# Altium PCB wrist_band_v2.0.PcbDoc
Units mil, origin at the board's own origin, x right, y up, seen from the top; angles counter-clockwise.
Board outline 6000 x 4000 mil, 2 copper layers (Top Layer, Bottom Layer); 82 components, 52 nets, 273 pads, 5 vias.
Unrouted connection lines stored in the file: 185.
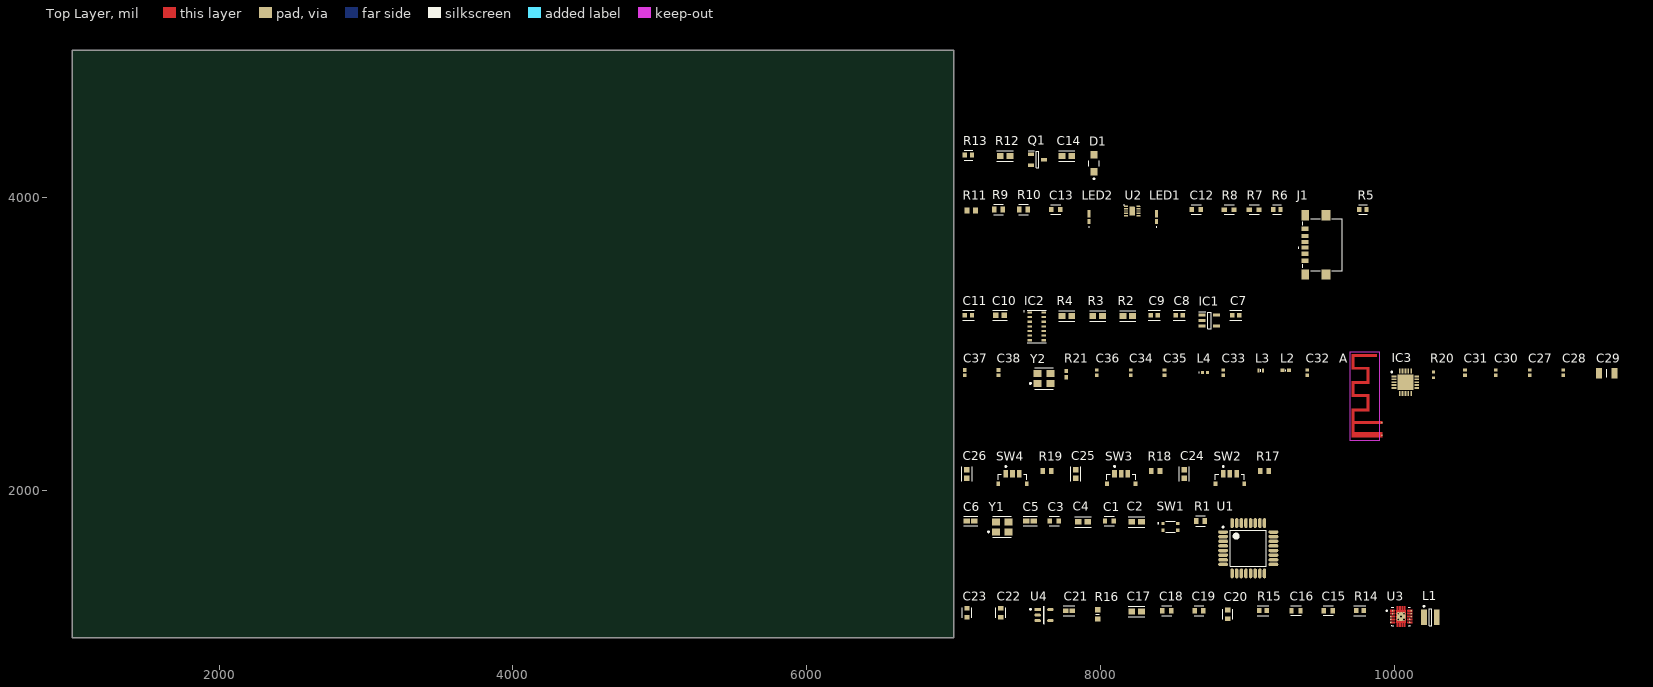
[diagram p0: Top Layer view]
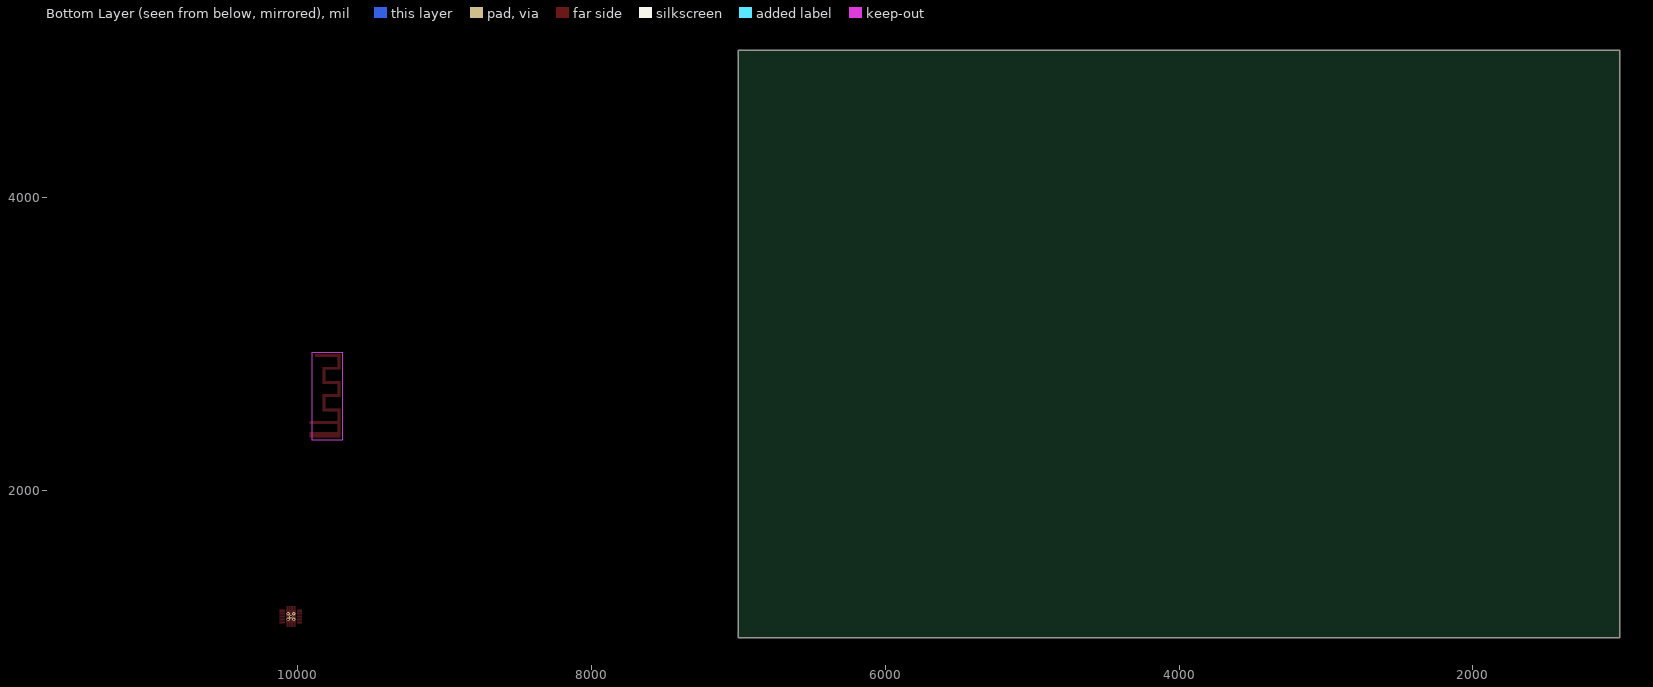
[diagram p1: Bottom Layer view, seen from below]

## Layer stack, top to bottom
Top Solder: solder mask 0.4, Solder Resist, Dk 3.5
Top Layer: signal copper 1.4
Dielectric 1: dielectric 12.6, FR-4, Dk 4.8
Bottom Layer: signal copper 1.4
Bottom Solder: solder mask 0.4, Solder Resist, Dk 3.5

## Board outline
1000,1000 7000,1000 7000,5000 1000,5000

## Design rules (kind name [scope] priority, off if disabled: settings)
Clearance [All] p1: gap=10 ignorepadtopadclearanceinfootprint=FALSE except(0: Arc-Hole Track-Hole SMDPad-Hole THPad-Hole Via-Hole Fill-Hole Poly-Hole Region-Hole Text-Hole)
PolygonConnect [All] p1: connectstyle=Relief reliefconductorwidth=10 reliefentries=4 polygonreliefangle="90 Angle" airgapwidth=10
RoutingVias [All] p1: holewidth=28 width=50 viastyle="Through Hole" minholewidth=28 minwidth=50 maxholewidth=28 maxwidth=50
SolderMaskExpansion [All] p1: expansion=4 istentingtop=FALSE
Width [All] p1: maxlimit=10 minlimit=10 preferedwidth=10
30 further rules are at their usual default settings.

## Classes and differential pairs
component class "Vibration Motor": C14 D1 Q1 R12 R13
component class "USB C charging port": C12 C13 J1 LED1 LED2 R5 R6 R7 R8 R9 R10 R11 U2
component class "Pulse Oximeter": C7 C8 C9 C10 C11 IC1 IC2 R2 R3 R4
component class Navigation_Buttons: C24 C25 C26 R17 R18 R19 SW2 SW3 SW4
component class MCU: C1 C2 C3 C4 C5 C6 R1 SW1 U1 Y1
component class "DC DC converters": C15 C16 C17 C18 C19 C20 C21 C22 C23 L1 R14 R15 R16 U3 U4

## Components (designator, comment, footprint, x,y, rotation, side; value= is the part's Value field where it differs from the comment)
A "2.4GHz antena" Antena 9900,2345 r90 top net-tie
C1 "GRM188R61A106KE69D" FP-GRM18-0_15-MFG 8060,1795 r0 top value=10uF
C2 "CL10B104KB8NNND" FP-CL10-IPC_A 8245,1790 r0 top
C3 "GRM188R61A106KE69D" FP-GRM18-0_15-MFG 7685,1795 r0 top value=10uF
C4 "CL10B104KB8NNND" FP-CL10-IPC_A 7880,1790 r0 top
C5 "C1608C0G1H220J080AA" FP-C1608-080-0_1-IPC_B 7520,1795 r0 top
C6 "C1608C0G1H220J080AA" FP-C1608-080-0_1-IPC_B 7115,1795 r0 top
C7 "CL10A105KP8NNNC" FP-CL10-IPC_C 8920,3195 r0 top
C8 "CL10A105KP8NNNC" FP-CL10-IPC_C 8535,3195 r0 top
C9 "CL10A105KP8NNNC" FP-CL10-IPC_C 8365,3195 r0 top
C10 "06036D106MAT2A" FP-0603-L_1_6_0_15-W_0_81-IPC_B 7315,3195 r0 top
C11 "CL10A105KP8NNNC" FP-CL10-IPC_C 7100,3195 r0 top
C12 "GRM188R61A106KE69D" FP-GRM18-0_15-MFG 8650,3915 r0 top value=10uF
C13 "GRM188R61A106KE69D" FP-GRM18-0_15-MFG 7695,3915 r0 top value=10uF
C14 "CL10B104KB8NNND" FP-CL10-IPC_A 7770,4280 r0 top
C15 "GRM188R61A106KE69D" FP-GRM18-0_15-MFG 9550,1185 r0 top value=10uF
C16 "GRM188R61A106KE69D" FP-GRM18-0_15-MFG 9330,1185 r0 top value=10uF
C17 "CL10B104KB8NNND" FP-CL10-IPC_A 8245,1180 r0 top
C18 "CC0603MRX5R5BB226" FP-CC0603-DC-MFG 8450,1185 r0 top
C19 "CC0603MRX5R5BB226" FP-CC0603-DC-MFG 8670,1185 r0 top
C20 "CC0603MRX5R5BB226" FP-CC0603-DC-MFG 8865,1160 r90 top
C21 "C1608C0G1H100D080AA" FP-C1608-080-0_1-IPC_C 7785,1185 r0 top
C22 "GRM188R61A106KE69D" FP-GRM18-0_15-MFG 7320,1170 r90 top value=10uF
C23 "GRM188R61A106KE69D" FP-GRM18-0_15-MFG 7090,1170 r90 top value=10uF
C24 "06036D106MAT2A" FP-0603-L_1_6_0_15-W_0_81-IPC_B 8570,2115 r90 top
C25 "06036D106MAT2A" FP-0603-L_1_6_0_15-W_0_81-IPC_B 7830,2115 r90 top
C26 "06036D106MAT2A" FP-0603-L_1_6_0_15-W_0_81-IPC_B 7090,2115 r90 top
C27 "GRM155R71C103KA01D" CAPC1005X55N 10920,2805 r90 top
C28 "GRM1555C1H911JA01D" CAPC1005X55N 11150,2805 r90 top
C29 "GRM319R60J106ME19J" CAPC3216X95N 11445,2800 r0 top
C30 "GRM155R71C103KA01D" CAPC1005X55N 10690,2805 r90 top
C31 "GRM155R71C333KA01D" CAPC1005X55N 10480,2805 r90 top
C32 "GJM1555C1H1R5WB01D" CAPC1005X55N 9405,2805 r90 top
C33 "GJM1555C1H1R0WB01D" CAPC1005X55N 8835,2805 r90 top
C34 "GCM155R71H222KA37D" CAPC1005X55N 8205,2805 r90 top
C35 "GRM1555C1H4R7CA01D" CAPC1005X55N 8435,2805 r90 top
C36 "GRM155R71C103KA01D" CAPC1005X55N 7975,2805 r90 top
C37 "GRM1555C1H220JA01D" CAPC1005X55X25NL05T10 7075,2805 r90 top
C38 "GRM1555C1H220JA01D" CAPC1005X55X25NL05T10 7305,2805 r90 top
D1 "MBR120ESFT1G" On_Semiconductor_498_MFG 7955,4230 r90 top
IC1 "TPS7A2018PDBVR" SOT95P280X145-5N 8740,3160 r0 top
IC2 "MAX30102EFD+" 14-LEAD-OESIP 7565,3120 r0 top
IC3 "NRF24L01-REEL7" QFN50P400X400X80-21N-D 10075,2740 r0 top
J1 "USB4135-GF-A" USB4135GFA 9510,3675 r90 top
L1 "SRN3015-1R0Y" BOUR-SRN3015-2_V 10245,1140 r0 top
L2 "ATFC-0402HQ-3N9B-T" INDC1005X37N 9260,2820 r0 top
L3 "LQG15HS8N2H02D" LQG15WH0N7B02D 9090,2820 r0 top
L4 "MLG1005S0N3BT000" MLG1005 8710,2805 r0 top
LED1 "ASCKCR00-BU5V5020402" ASCKCR00BU5V5020402 8380,3865 r90 top
LED2 "ASCKCR00-BU5V5020402" ASCKCR00BU5V5020402 7920,3865 r90 top
Q1 "SI2302DS" SOT95P230X110-3N 7570,4255 r0 top
R1 "CRCW060310K0FKEAHP" FP-CRCW0603-HPe3-MFG 8680,1795 r0 top
R2 "ESR03EZPJ472" FP-ESR03-IPC_A 8185,3190 r0 top
R3 "ESR03EZPJ472" FP-ESR03-IPC_A 7980,3190 r0 top
R4 "ESR03EZPJ472" FP-ESR03-IPC_A 7770,3190 r0 top
R5 "CRCW06035K10FKEA" FP-CRCW0603-e3-IPC_C 9785,3915 r0 top
R6 "CRCW06035K10FKEA" FP-CRCW0603-e3-IPC_C 9200,3915 r0 top
R7 "RT0603FRE071K5L" FP-RT0603-MFG 9045,3915 r0 top value=1.5KΩ
R8 "RT0603FRE071K5L" FP-RT0603-MFG 8875,3915 r0 top value=1.5KΩ
R9 "CRCW06031K00FKEAHP" FP-CRCW0603-HPe3-MFG 7305,3915 r0 top
R10 "CRCW060310K0FKEAHP" FP-CRCW0603-HPe3-MFG 7475,3915 r0 top
R11 "ERJ-3EKF5490V" RESC1608X55X30ML15T15 7120,3910 r0 top
R12 "ESR03EZPF1001" FP-ESR03-IPC_A 7350,4280 r0 top
R13 "CRCW0603100KJNEA" FP-CRCW0603-e3-IPC_C 7100,4285 r0 top
R14 "ERJ-3EKF1004V" FP-ERJ3EK-IPC_C 9765,1185 r0 top
R15 "ERJ-3EKF1004V" FP-ERJ3EK-IPC_C 9105,1185 r0 top
R16 "RN73H1JTTD1113D25" RESC1608X55N 7980,1160 r90 top
R17 "RC0603JR-0710KL" RESC1608X55X25ML10T15 9115,2135 r0 top
R18 "RC0603JR-0710KL" RESC1608X55X25ML10T15 8375,2135 r0 top
R19 "RC0603JR-0710KL" RESC1608X55X25ML10T15 7635,2135 r0 top
R20 "ERA-2AEB223X" ERA2AED122X 10265,2790 r90 top
R21 "RC0402FR-071ML" RESC1005X40N 7765,2795 r90 top
SW1 "USLPT2819DT2TR" USLPT2819DT2TR 8475,1755 r0 top
SW2 "EVP-AEDB2A" FP-EVP-AEDB2A-MFG 8880,2060 r0 top
SW3 "EVP-AEDB2A" FP-EVP-AEDB2A-MFG 8140,2060 r0 top
SW4 "EVP-AEDB2A" FP-EVP-AEDB2A-MFG 7400,2060 r0 top
U1 "ATMEGA328P-AU" ATML-32A_M 9005,1610 r0 top
U2 "BQ24040DSQR" DSQ0010A_V 8215,3905 r0 top
U3 "TPS63060DSCR" FP-DSC0010G-MFG 10045,1145 r0 top
U4 "AP2204K-3.3TRG1" FP-SOT25-IPC_C 7615,1155 r0 top
Y1 "ABM8G-16.000MHZ-B4Y-T" FP-ABM8G-MFG 7330,1755 r0 top
Y2 "ABM8G-16.000MHZ-18-D2Y-T" FP-ABM8G-MFG 7615,2765 r0 top

## Footprints (in the part's own frame and the unit in brackets; to place one, negate y for a bottom-side part, rotate by r counter-clockwise, add the part's x,y. Pads: shape width x height; smd on the part's side, far side on the other; paste and mask are expansions set on the pad)
14-LEAD-OESIP [mm]
  rect 0.75x0.35 smd: 1(-1.2,2.4) 2(-1.2,1.6) 3(-1.2,0.8) 4(-1.2,0) 5(-1.2,-0.8) 6(-1.2,-1.6) 7(-1.2,-2.4) 8(1.2,-2.4) 9(1.2,-1.6) 10(1.2,-0.8) 11(1.2,0) 12(1.2,0.8) 13(1.2,1.6) 14(1.2,2.4)
  silkscreen extent -2.28,-2.8 1.65,2.8, body extent -1.4,-2.8 1.4,2.8, height 1.3
Antena [mil] "2.4GHz antena"
  round 10 smd: 1(120,-15) 2(35,-15)
  Top Layer region: 566.93,18.39 586.61,18.39 586.61,193.19 566.93,193.19
  Top Layer region: 586.61,173.5 586.61,193.18 480.32,193.18 480.32,173.5
  Top Layer region: 480.31,69.57 500,69.57 500,193.19 480.31,193.19
  Top Layer region: 500,69.57 500,89.25 381.89,89.25 381.89,69.57
  Top Layer region: 381.89,69.57 401.57,69.57 401.57,193.19 381.89,193.19
  Top Layer region: 401.57,173.5 401.57,193.18 295.28,193.18 295.28,173.5
  Top Layer region: 295.28,69.57 314.96,69.57 314.96,193.19 295.28,193.19
  Top Layer region: 196.85,69.57 216.54,69.57 216.54,193.19 196.85,193.19
  Top Layer region: 19.68,-19.41 55.12,-19.41 55.12,193.19 19.68,193.19
  Top Layer region: 110.24,-19.41 129.92,-19.41 129.92,193.19 110.24,193.19
  Top Layer region: 216.54,173.5 216.54,193.18 19.68,193.18 19.68,173.5
  Top Layer region: 314.96,69.57 314.96,89.25 196.85,89.25 196.85,69.57
  Keep-Out Layer region: 0,0 598.43,0 598.43,204.72 0,204.72
ASCKCR00BU5V5020402 [mm]
  rect 0.87x0.5 smd: 1(-0.765,0)
  rect 1.3x0.5 smd: 2(0.55,0)
  silkscreen extent -1.8,-0.05 -1.7,0.05, body extent -0.8,0 0.8,0.55, height 0.4
ATML-32A_M [mm] "TQFP, 32-Leads, Body 7x7mm, Pitch 0.8mm, IPC Low Density"
  oval 1.7x0.6 smd: 1(-4.35,2.8) 2(-4.35,2) 3(-4.35,1.2) 4(-4.35,0.4) 5(-4.35,-0.4) 6(-4.35,-1.2) 7(-4.35,-2) 8(-4.35,-2.8) 17(4.35,-2.8) 18(4.35,-2) 19(4.35,-1.2) 20(4.35,-0.4) 21(4.35,0.4) 22(4.35,1.2) 23(4.35,2) 24(4.35,2.8)
  oval 0.6x1.7 smd: 9(-2.8,-4.35) 10(-2,-4.35) 11(-1.2,-4.35) 12(-0.4,-4.35) 13(0.4,-4.35) 14(1.2,-4.35) 15(2,-4.35) 16(2.8,-4.35) 25(2.8,4.35) 26(2,4.35) 27(1.2,4.35) 28(0.4,4.35) 29(-0.4,4.35) 30(-1.2,4.35) 31(-2,4.35) 32(-2.8,4.35)
  silkscreen extent -4.47,-3.1 3.1,3.77, body extent -4.5,-4.5 4.5,4.5, height 1.2
BOUR-SRN3015-2_V [mm] "SMD, 2-Leads, Body 3x3mm, Height 1.5mm"
  rect 1x2.7 smd: 1(-1.1,0) 2(1.1,0)
  silkscreen extent -1.22,-1.5 0.2,2.02, body extent -1.5,-1.5 1.5,1.5, height 1.5
CAPC1005X55N [mm]
  rect 0.6x0.62 smd: 1(-0.46,0) 2(0.46,0)
  body extent -0.5,-0.25 0.5,0.25, height 0.55
CAPC1005X55X25NL05T10 [mm] "Chip Capacitor, 2-Leads, Body 1.00x0.50mm, IPC Medium Density"
  rect 0.66x0.62 smd: 1(-0.44,0) 2(0.44,0)
  body extent -0.53,-0.28 0.53,0.27, height 0.55
CAPC3216X95N [mm]
  rect 1.04x1.78 smd: 1(-1.37,0) 2(1.37,0)
  silkscreen extent 0,-0.7 0,0.7, body extent -1.6,-0.8 1.6,0.8, height 0.95
DSQ0010A_V [mm] "SON, 10-Leads, Body 2x2mm, Pitch 0.4mm, Thermal Pad 1.5x0.9mm"
  rrect43% 0.7x0.23 smd: 1(-1.05,0.8) 2(-1.05,0.4) 3(-1.05,0) 4(-1.05,-0.4) 5(-1.05,-0.8) 6(1.05,-0.8) 7(1.05,-0.4) 8(1.05,0) 9(1.05,0.4) 10(1.05,0.8)
  rrect11% 0.9x1.5 smd: 11(0,0)
  silkscreen extent -1.5,1 -1.4,1.1, body extent -1,-1 1,1, height 0.8
ERA2AED122X [mm]
  rect 0.475x0.5 smd: 1(-0.512,0) 2(0.512,0)
  body extent -0.5,-0.25 0.5,0.25, height 0.35
FP-0603-L_1_6_0_15-W_0_81-IPC_B [mil]
  rect 39.63x38.12 smd paste+0 mask+0: 1(-28.58,0) 2(28.58,0)
  silkscreen extent -48,-35 48,35, body extent -58,-29 58,29, height 10
FP-ABM8G-MFG [mm]
  rect 1.4x1.2 smd paste+0 mask+0: 1(-1.1,-0.85) 2(1.1,-0.85) 3(1.1,0.85) 4(-1.1,0.85)
  silkscreen extent -2.47,-1.83 1.6,1.83, body extent -1.9,-1.55 1.9,1.55, height 0.25
FP-C1608-080-0_1-IPC_B [mil]
  rect 44.53x35.91 smd paste+0 mask+0: 1(-25.22,0) 2(25.22,0)
  silkscreen extent -47,-34 47,34, body extent -57,-28 57,28, height 10
FP-C1608-080-0_1-IPC_C [mil]
  rect 36.66x31.97 smd paste+0 mask+0: 1(-21.28,0) 2(21.28,0)
  silkscreen extent -40,-33 40,33, body extent -44,-22 44,22, height 10
FP-CC0603-DC-MFG [mm]
  rect 0.8x0.9 smd paste+0 mask+0: 1(-0.75,0) 2(0.75,0)
  silkscreen extent -0.85,-0.87 0.85,0.87, body extent -1.43,-0.82 1.43,0.82, height 0.25
FP-CL10-IPC_A [mil]
  rect 45.6x39.85 smd paste+0 mask+0: 1(-32.56,0) 2(32.56,0)
  silkscreen extent -55,-36 55,36, body extent -75,-40 75,40, height 10
FP-CL10-IPC_C [mil]
  rect 29.85x31.97 smd paste+0 mask+0: 1(-24.68,0) 2(24.68,0)
  silkscreen extent -40,-33 40,33, body extent -44,-22 44,22, height 10
FP-CRCW0603-e3-IPC_C [mil]
  rect 28.94x33.94 smd paste+0 mask+0: 1(-24.23,0) 2(24.23,0)
  silkscreen extent -30,-33 30,33, body extent -43,-23 43,23, height 10
FP-CRCW0603-HPe3-MFG [mm]
  rect 0.75x1 smd paste+0 mask+0: 1(-0.75,0) 2(0.75,0)
  silkscreen extent -0.8,-0.9 0.8,0.9, body extent -1.22,-0.6 1.22,0.6, height 0.25
FP-DSC0010G-MFG [mm]
  round 0.252 smd paste-1000 mask+0: 1(-1.475,1) 2(-1.475,0.5) 3(-1.76,0) 4(-1.76,-0.5) 5(-1.76,-1) 6(1.475,-1) 7(1.475,-0.5) 8(1.75,0) 9(1.75,0.5) 10(1.75,1)
  round 1.53 smd paste-1000 mask+0: 11(0,0)
  Top Layer region: 1.9,0.86 1.19,0.86 1.136,0.871 1.091,0.901 1.061,0.946 1.05,1 1.05,1 1.061,1.054 1.091,1.099 1.136,1.129 1.19,1.14 1.19,1.14 1.9,1.14
  Top Layer region: 1.9,0.36 1.19,0.36 1.136,0.371 1.091,0.401 1.061,0.446 1.05,0.5 1.05,0.5 1.061,0.554 1.091,0.599 1.136,0.629 1.19,0.64 1.19,0.64 1.9,0.64
  Top Layer region: 1.9,-0.14 1.19,-0.14 1.136,-0.129 1.091,-0.099 1.061,-0.054 1.05,0 1.05,0 1.061,0.054 1.091,0.099 1.136,0.129 1.19,0.14 1.19,0.14 1.9,0.14
  Top Layer region: 1.9,-0.64 1.19,-0.64 1.136,-0.629 1.091,-0.599 1.061,-0.554 1.05,-0.5 1.05,-0.5 1.061,-0.446 1.091,-0.401 1.136,-0.371 1.19,-0.36 1.19,-0.36 1.9,-0.36
  Top Layer region: 1.9,-1.14 1.19,-1.14 1.136,-1.129 1.091,-1.099 1.061,-1.054 1.05,-1 1.05,-1 1.061,-0.946 1.091,-0.901 1.136,-0.871 1.19,-0.86 1.19,-0.86 1.9,-0.86
  Top Layer region: -1.9,-0.86 -1.19,-0.86 -1.136,-0.871 -1.091,-0.901 -1.061,-0.946 -1.05,-1 -1.05,-1 -1.061,-1.054 -1.091,-1.099 -1.136,-1.129 -1.19,-1.14 -1.19,-1.14 -1.9,-1.14
  Top Layer region: -1.9,-0.36 -1.19,-0.36 -1.136,-0.371 -1.091,-0.401 -1.061,-0.446 -1.05,-0.5 -1.05,-0.5 -1.061,-0.554 -1.091,-0.599 -1.136,-0.629 -1.19,-0.64 -1.19,-0.64 -1.9,-0.64
  Top Layer region: -1.9,0.14 -1.19,0.14 -1.136,0.129 -1.091,0.099 -1.061,0.054 -1.05,0 -1.05,0 -1.061,-0.054 -1.091,-0.099 -1.136,-0.129 -1.19,-0.14 -1.19,-0.14 -1.9,-0.14
  Top Layer region: -1.9,0.64 -1.19,0.64 -1.136,0.629 -1.091,0.599 -1.061,0.554 -1.05,0.5 -1.05,0.5 -1.061,0.446 -1.091,0.401 -1.136,0.371 -1.19,0.36 -1.19,0.36 -1.9,0.36
  Top Layer region: -1.9,1.14 -1.19,1.14 -1.136,1.129 -1.091,1.099 -1.061,1.054 -1.05,1 -1.05,1 -1.061,0.946 -1.091,0.901 -1.136,0.871 -1.19,0.86 -1.19,0.86 -1.9,0.86
  Top Layer region: -0.85,1.075 -0.725,1.075 -0.725,1.775 -0.475,1.775 -0.475,1.075 -0.325,1.075 -0.325,1.775 -0.075,1.775 -0.075,1.075 0.075,1.075 0.075,1.775 0.325,1.775 0.325,1.075 0.475,1.075 0.475,1.775 0.725,1.775 0.725,1.075 0.85,1.075 0.85,-1.075 0.725,-1.075 0.725,-1.775 0.475,-1.775 0.475,-1.075 0.325,-1.075 0.325,-1.775 0.075,-1.775 0.075,-1.075 -0.075,-1.075 -0.075,-1.775 -0.325,-1.775 -0.325,-1.075 -0.475,-1.075 -0.475,-1.775 -0.725,-1.775 -0.725,-1.075 -0.85,-1.075
  silkscreen extent -2.6,-1.58 1.58,1.58, body extent -2,-1.88 2,1.88, height 0.25
FP-ERJ3EK-IPC_C [mil]
  rect 29.78x33.94 smd paste+0 mask+0: 1(-25.62,0) 2(25.62,0)
  silkscreen extent -41,-34 41,34, body extent -44,-23 44,23, height 10
FP-ESR03-IPC_A [mil]
  rect 45.6x39.85 smd paste+0 mask+0: 1(-32.56,0) 2(32.56,0)
  silkscreen extent -55,-36 55,36, body extent -75,-40 75,40, height 10
FP-EVP-AEDB2A-MFG [mm]
  rect 0.8x1.35 smd paste+0 mask+0: 1(-1.15,1.445) 1'(1.15,1.445) 2(0,1.445)
  rect 0.65x0.7 smd paste+0 mask+0: 3(-2.475,-0.28) 4(2.475,-0.28)
  silkscreen extent -2.5,0.45 2.5,2.82, body extent -2.93,-1.53 2.93,2.24, height 0.25
FP-GRM18-0_15-MFG [mm]
  rect 0.75x0.9 smd paste+0 mask+0: 1(-0.775,0) 2(0.775,0)
  silkscreen extent -0.88,-0.83 0.87,0.85, body extent -1.25,-0.58 1.25,0.58, height 0.25
FP-RT0603-MFG [mm]
  rect 0.9x0.8 smd paste+0 mask+0: 1(-0.85,0) 2(0.85,0)
  silkscreen extent -0.85,-0.81 0.86,0.8, body extent -1.4,-0.55 1.4,0.55, height 0.25
FP-SOT25-IPC_C [mm]
  rect 1.107x0.536 smd paste+0 mask+0: 1(-1.101,0.95)
  rrect100% 1.107x0.536 smd paste+0 mask+0: 2(-1.101,0) 3(-1.101,-0.95) 4(1.101,-0.95) 5(1.101,0.95)
  silkscreen extent -2.48,-1.5 0.05,1.5, body extent -1.75,-1.6 1.75,1.6, height 0.25
INDC1005X37N [mm]
  rect 0.7x0.6 smd: 1(-0.55,0) 2(0.55,0)
  silkscreen extent 0,-0.15 0,0.15, body extent -0.5,-0.25 0.5,0.25, height 0.37
LQG15WH0N7B02D [mm]
  rect 0.35x0.65 smd: 1(-0.425,0) 2(0.425,0)
  silkscreen extent 0,-0.25 0,0.25, body extent -0.5,-0.25 0.5,0.25, height 0.55
MLG1005 [mm]
  rect 0.5x0.5 smd: 1(-0.45,0) 2(0.45,0)
  silkscreen extent -1.1,-0.05 -1,0.05, body extent -0.5,-0.25 0.5,0.25, height 0.5
On_Semiconductor_498_MFG [mm]
  rect 1.25x1.22 smd paste+0 mask+0: 1(-1.475,0) 2(1.475,0)
  silkscreen extent -2.8,-0.9 0.48,0.9, body extent -2.2,-1 2.2,1, height 0.25
QFN50P400X400X80-21N-D [mm]
  rect 0.85x0.3 smd: 1(-1.95,1) 2(-1.95,0.5) 3(-1.95,0) 4(-1.95,-0.5) 5(-1.95,-1) 11(1.95,-1) 12(1.95,-0.5) 13(1.95,0) 14(1.95,0.5) 15(1.95,1)
  rect 0.3x0.85 smd: 6(-1,-1.95) 7(-0.5,-1.95) 8(0,-1.95) 9(0.5,-1.95) 10(1,-1.95) 16(1,1.95) 17(0.5,1.95) 18(0,1.95) 19(-0.5,1.95) 20(-1,1.95)
  rect 2.7x2.7 smd: 21(0,0)
  silkscreen extent -2.5,1.63 -2.25,1.87, body extent -2.05,-2.05 2.05,2.05, height 0.8
RESC1005X40N [mm]
  rect 0.75x0.6 smd: 1(-0.55,0) 2(0.55,0)
  body extent -0.5,-0.25 0.5,0.25, height 0.4
RESC1608X55N [mm]
  rect 0.9x0.95 smd: 1(-0.8,0) 2(0.8,0)
  silkscreen extent 0,-0.3 0,0.3, body extent -0.8,-0.4 0.8,0.4, height 0.55
RESC1608X55X25ML10T15 [mm] "Chip Resistor, 2-Leads, Body 1.60x0.80mm, IPC Low Density"
  rect 0.8x1 smd: 1(-0.75,0) 2(0.75,0)
  body extent -0.85,-0.45 0.85,0.45, height 0.55
RESC1608X55X30ML15T15 [mm] "Chip Resistor, 2-Leads, Body 1.60x0.80mm, IPC Low Density"
  rect 0.9x1.05 smd: 1(-0.725,0) 2(0.725,0)
  body extent -0.87,-0.48 0.87,0.48, height 0.55
SOT95P230X110-3N [mm]
  rect 1.05x0.6 smd: 1(-1.1,0.95) 2(-1.1,-0.95) 3(1.1,0)
  silkscreen extent -1.63,-1.45 0.23,1.5, body extent -1.2,-1.45 1.2,1.45, height 0.95
SOT95P280X145-5N [mm]
  rect 1.2x0.6 smd: 1(-1.25,0.95) 2(-1.25,0) 3(-1.25,-0.95) 4(1.25,-0.95) 5(1.25,0.95)
  silkscreen extent -1.85,-1.45 0.3,1.5, body extent -1.4,-1.45 1.4,1.45, height 1.2
USB4135GFA [mm]
  rect 0.7x1.2 smd: A5(-0.5,3.055) B5(0.5,3.055)
  rect 0.76x1.2 smd: A9(1.52,3.055) B9(-1.52,3.055)
  rect 0.8x1.2 smd: A12(2.75,3.055) B12(-2.75,3.055)
  rect 1.8x1.35 smd: MP1(-5.125,2.98) MP2(5.125,2.98)
  rect 1.8x1.5 smd: MP3(-5.125,-0.6) MP4(5.125,-0.6)
  silkscreen extent -4.47,-3.45 4.47,4.2, body extent -5.58,-3.35 5.56,3.55, height 3.25
USLPT2819DT2TR [mm]
  rect 0.57x0.55 smd: T1(-1.275,0.58) T2(1.275,0.58) T3(-1.275,-0.58) T4(1.275,-0.58)
  silkscreen extent -2.2,-0.95 0.8,0.95, body extent -1.5,-0.95 1.5,0.95, height 0.6

## Part data
C1 C3 C12 C13 C15 C16 C22 C23: library part CMP-2000-05448-2, "CAP CER 10UF 10V X5R 0603", Capacitance=10uF, Manufacturer=Murata, Package=GRM18-0.15, Temperature="-55°C to +85°C", Temperature Characteristic=X5R, Temperature Coefficient=15%, Temperature Range High=+85°C, Temperature Range Low=-55°C, Tolerance=10%, Voltage Rating=10V, Automotive=No, Category=Cap, ComponentLink2Description=Datasheet, ComponentLink2URL=https://search.murata.co.jp/Ceramy/image/img/A01X/G101/ENG/GRM188R61A106KE69-01A.pdf, Device Class L1="Passive Components", Device Class L2=Capacitors, Device Class L3="Ceramic Capacitors", Digikey Description="CAP CER 10UF 10V X5R 0603", Height=0.95mm, Lead Free=Yes, Manufacturer Part Number=GRM188R61A106KE69D, Material=Ceramic, Mouser Description="Multilayer Ceramic Capacitors MLCC - SMD/SMT 0603 10uF 10volts X5R + - 10%", Octopart=https://octopart.com/grm188r61a106ke69d-murata-22851381, RoHS=TRUE
C2 C4 C14 C17: library part CMP-13271-000587-1, "Cap Ceramic 100nF 50V X7R ±10% Pad SMD 0603 +125°C T/R", Capacitance=100nF, Case/Package=0603, Dielectric=X7R, Max Operating Temperature=125°C, Min Operating Temperature=-55°C, Package Quantity=10000, Tolerance=10%, Voltage=50V, Depth=0.8mm, Height=0.8mm, Lead Free="Lead Free", Length=1.6mm, Material=Ceramic, Mount="Surface Mount", Packaging="Tape and Reel", Radiation Hardening=No, Thickness=0.035inch, Voltage Rating=50V, Voltage Rating (DC)=50V, Width=0.031inch
C5 C6: library part CMP-2000-06024-2, "CAP CER 22PF 50V C0G 0603", Capacitance=22pF, Case Code (Imperial)=0603, Case Code (Metric)=1608, Dielectric=C0G, Dielectric Material=Ceramic, Max Operating Temperature=125°C, Min Operating Temperature=-55°C, Package Quantity=1, Temperature Coefficient=30ppm/°C, Tolerance=5%, Voltage=50V, Case/Package=0603, Construction=Flat, Depth=0.8mm, Height=0.8mm, Lead Free="Lead Free", Length=1.6mm, Mount="Surface Mount", Number of Pins=2, Packaging="Tape and Reel", Radiation Hardening=No, RoHS Compliant=Yes, Series=C, Termination=SMD/SMT, Thickness=0.037inch, Voltage Rating=50V, Voltage Rating (DC)=50V, Weight=7.1E-05oz, Width=0.031inch
C7 C8 C9 C11: library part CMP-13271-003399-1, "Cap Ceramic 1uF 10V X5R ±10% Pad SMD 0603 +85°C T/R", Capacitance=1uF, Case Code (Imperial)=0603, Case Code (Metric)=1608, Dielectric=X5R, Max Operating Temperature=85°C, Min Operating Temperature=-55°C, Package Quantity=1, Tolerance=10%, Voltage=10V, Case/Package=0603, Contact Plating=Tin, Depth=0.8mm, Height=0.8mm, Length=1.6mm, Mount="Surface Mount", Packaging="Tape and Reel", Radiation Hardening=No, Thickness=0.035inch, Voltage Rating=10V, Width=0.031inch
C10 C24 C25 C26: library part CMP-2006-04476-2, "General Purpose Ceramic Capacitor, 0603, 10uF, 20%, X5R, 15%, 6.3V", Capacitance=10uF, Case Code (Imperial)=0603, Case Code (Metric)=1608, Dielectric=X5R, Dielectric Material=Ceramic, Max Operating Temperature=85°C, Min Operating Temperature=-55°C, Package Quantity=1, Tolerance=20%, Voltage=6.3V, Case/Package=0603, Construction=Flat, Contact Plating=Tin, Depth=0.81mm, Height=0.9mm, Lead Free="Lead Free", Length=1.6mm, Mount="Surface Mount", Number of Pins=2, Packaging="Tape and Reel", Radiation Hardening=No, REACH SVHC="No SVHC", RoHS Compliant=Yes, Series=-, Termination=SMD/SMT, Thickness=0.035inch, Voltage Rating=6.3V, Voltage Rating (DC)=6.3V, Width=0.032inch
C18 C19 C20: library part CMP-2000-06075-2, "CAP CER 22UF 6.3V X5R 0603", Capacitance=22uF, Case Code (Imperial)=0603, Case Code (Metric)=1608, Dielectric=X5R, Max Operating Temperature=85°C, Min Operating Temperature=-55°C, Package Quantity=4000, Resistor Type=Ceramic, Tolerance=20%, Voltage Rating=6.3V, Case/Package=0603, Depth=0.8mm, Halogen Free="Halogen Free", Lead Free="Lead Free", Length=0.063inch, Mount="Surface Mount", Packaging="Tape and Reel", RoHS Compliant=Yes, Termination=SMD/SMT, Thickness=0.035inch, Voltage Rating (DC)=6.3V, Weight=7.1E-05oz, Width=0.031inch
C21: library part CMP-08246-005843-1, "Multilayer Ceramic Capacitors 10pF ±0.5pF 50V C0G SMD 0603", Capacitance=10pF, Case Code (Imperial)=0603, Case Code (Metric)=1608, Dielectric=C0G, Dielectric Material=Ceramic, Max Operating Temperature=125°C, Min Operating Temperature=-55°C, Package Quantity=1, Temperature Coefficient=30ppm/°C, Tolerance=5%, Voltage=50V, Case/Package=0603, Construction=Flat, Depth=0.8mm, Height=0.8mm, Lead Free="Lead Free", Length=1.6mm, Mount="Surface Mount", Number of Pins=2, Packaging="Tape and Reel", Radiation Hardening=No, REACH SVHC="No SVHC", RoHS Compliant=Yes, Series=C, Termination=SMD/SMT, Thickness=0.037inch, Voltage Rating=50V, Voltage Rating (DC)=50V, Weight=7.1E-05oz, Width=0.031inch
C27 C30 C36: "Capacitor", Manufacturer_Name="Murata Electronics", Mouser Part Number=81-GRM36X103K16, Arrow Part Number=GRM155R71C103KA01D, Arrow Price/Stock=https://www.arrow.com/en/products/grm155r71c103ka01d/murata-manufacturing?region=europe, Datasheet Link=http://www.murata.com/~/media/webrenewal/support/library/catalog/products/capacitor/mlcc/c02e.pdf, Height=0.55mm, Manufacturer_Part_Number=GRM155R71C103KA01D, Mouser Price/Stock=https://www.mouser.co.uk/ProductDetail/Murata-Electronics/GRM155R71C103KA01D?qs=8YPuuxuUzMI%252B9QLnzeLwhQ%3D%3D
C28: "Capacitor", Manufacturer_Name="Murata Electronics", Mouser Part Number=81-GRM1555C1H911JA1D, Datasheet Link=http://www.murata.com/~/media/webrenewal/support/library/catalog/products/capacitor/mlcc/c02e.pdf, Height=0.55mm, Manufacturer_Part_Number=GRM1555C1H911JA01D, Mouser Price/Stock=https://www.mouser.co.uk/ProductDetail/Murata-Electronics/GRM1555C1H911JA01D?qs=p6VZ%252BklCkRTpKNdGAzqH7g%3D%3D
C29: library part CMP-13271-000002-1, "CAP CER 10UF 10V X5R 0402", Manufacturer_Name="Murata Electronics", Mouser Part Number=81-GRM319R60J106ME9J, Datasheet Link=http://www.murata.com/~/media/webrenewal/support/library/catalog/products/capacitor/mlcc/c02e.pdf, Height=0.95mm, Manufacturer_Part_Number=GRM319R60J106ME19J, Mouser Price/Stock=https://www.mouser.co.uk/ProductDetail/Murata-Electronics/GRM319R60J106ME19J?qs=MY6wChARw2y3T227WLEMMA%3D%3D
C31: "Capacitor", Manufacturer_Name="Murata Electronics", Arrow Part Number=GRM155R71C333KA01D, Arrow Price/Stock=https://www.arrow.com/en/products/grm155r71c333ka01d/murata-manufacturing, Datasheet Link=http://www.murata.com/~/media/webrenewal/support/library/catalog/products/capacitor/mlcc/c02e.pdf, Height=0.55mm, Manufacturer_Part_Number=GRM155R71C333KA01D
C32: "Capacitor", Manufacturer_Name="Murata Electronics", Mouser Part Number=81-GJM1555C1H1R5WB1D, Arrow Part Number=GJM1555C1H1R5WB01D, Arrow Price/Stock=https://www.arrow.com/en/products/gjm1555c1h1r5wb01d/murata-manufacturing?region=nac, Datasheet Link=https://psearch.en.murata.com/capacitor/product/GJM1555C1H1R5WB01%23.html, Height=0.55mm, Manufacturer_Part_Number=GJM1555C1H1R5WB01D, Mouser Price/Stock=https://www.mouser.co.uk/ProductDetail/Murata-Electronics/GJM1555C1H1R5WB01D?qs=YLLXL5qGyDucsRPozQcunA%3D%3D
C33: "Capacitor", Manufacturer_Name="Murata Electronics", Mouser Part Number=81-GJM1555C1H1R0WB1D, Arrow Part Number=GJM1555C1H1R0WB01D, Arrow Price/Stock=https://www.arrow.com/en/products/gjm1555c1h1r0wb01d/murata-manufacturing?region=nac, Datasheet Link=https://psearch.en.murata.com/capacitor/product/GJM1555C1H1R0WB01%23.html, Height=0.55mm, Manufacturer_Part_Number=GJM1555C1H1R0WB01D, Mouser Price/Stock=https://www.mouser.co.uk/ProductDetail/Murata-Electronics/GJM1555C1H1R0WB01D?qs=YLLXL5qGyDtaruZHJwTPNg%3D%3D
C34: "Capacitor", Manufacturer_Name="Murata Electronics", Mouser Part Number=81-GCM155R71H222K37D, Arrow Part Number=GCM155R71H222KA37D, Arrow Price/Stock=https://www.arrow.com/en/products/gcm155r71h222ka37d/murata-manufacturing?region=nac, Datasheet Link=https://psearch.en.murata.com/capacitor/product/GCM155R71H222KA37%23.html, Height=0.55mm, Manufacturer_Part_Number=GCM155R71H222KA37D, Mouser Price/Stock=https://www.mouser.co.uk/ProductDetail/Murata-Electronics/GCM155R71H222KA37D?qs=QDXoN8f0aYKEsLYYwicpIw%3D%3D
C35: "Capacitor", Manufacturer_Name="Murata Electronics", Mouser Part Number=81-GRM1555C1H4R7CA1D, Arrow Part Number=GRM1555C1H4R7CA01D, Arrow Price/Stock=https://www.arrow.com/en/products/grm1555c1h4r7ca01d/murata-manufacturing, Datasheet Link=http://www.murata.com/~/media/webrenewal/support/library/catalog/products/capacitor/mlcc/c02e.pdf, Height=0.55mm, Manufacturer_Part_Number=GRM1555C1H4R7CA01D, Mouser Price/Stock=https://www.mouser.co.uk/ProductDetail/Murata-Electronics/GRM1555C1H4R7CA01D?qs=4k9rjS6ZRl7tSQRzstyMVg%3D%3D
C37 C38: library part CMP-2008-04302-1, Manufacturer=Murata, Part Number=GRM1555C1H220JA01D
D1: library part CMP-1055-00434-2, Average Rectified Current=1A, Forward Voltage=530mV, Manufacturer Lifecycle Status=ACTIVE, Max Forward Surge Current (Ifsm)=40A, Max Junction Temperature (Tj)=150°C, Max Repetitive Reverse Voltage (Vrrm)=20V, Max Reverse Leakage Current=10µA, Min Operating Temperature=-65°C, Contact Plating=Tin, Current Rating=1A, Element Configuration=Single, Forward Current=1A, Halogen Free="Halogen Free", Height=880µm, Lead Free="Lead Free", Length=2.9mm, Lifecycle Status=Production, Max Operating Temperature=150°C, Max Reverse Voltage (DC)=20V, Max Surge Current=40A, NexarPartId=330787, Number of Pins=2, Output Current=1A, Packaging="Cut Tape", Peak Non-Repetitive Surge Current=40A, Peak Reverse Current=10µA, Polarity=Standard, Radiation Hardening=No, REACH SVHC="No SVHC", Reverse Voltage=20V, RoHS=Compliant, Schedule B=8541100080, Voltage Rating (DC)=20V, Width=1.8mm
IC1: "Integrated Circuit", Manufacturer_Name="Texas Instruments", Mouser Part Number=595-TPS7A2018PDBVR, Arrow Part Number=TPS7A2018PDBVR, Arrow Price/Stock=https://www.arrow.com/en/products/tps7a2018pdbvr/texas-instruments?region=nac, Datasheet Link=https://datasheet.datasheetarchive.com/originals/distributors/Datasheets_SAMA/e65d9d311cedf91014769949f3101225.pdf, Height=1.45mm, Manufacturer_Part_Number=TPS7A2018PDBVR, Mouser Price/Stock=https://www.mouser.co.uk/ProductDetail/Texas-Instruments/TPS7A2018PDBVR?qs=hd1VzrDQEGheW9qdrIVGew%3D%3D
IC2: "Integrated Circuit", Manufacturer_Name="Analog Devices", Mouser Part Number=700-MAX30102EFD+, Datasheet Link=https://datasheets.maximintegrated.com/en/ds/MAX30102.pdf, Manufacturer_Part_Number=MAX30102EFD+, Mouser Price/Stock=https://www.mouser.co.uk/ProductDetail/Analog-Devices-Maxim-Integrated/MAX30102EFD%2b?qs=nVS1qgv%252BQrk9UYEvS27V%2Fg%3D%3D
IC3: "Integrated Circuit", Manufacturer_Name="Nordic Semiconductor", Mouser Part Number=949-NRF24L01-REEL7, Arrow Part Number=NRF24L01-REEL7, Arrow Price/Stock=null?region=nac, Datasheet Link=https://4donline.ihs.com/images/VipMasterIC/IC/NRSA/NRSAS00020/NRSAS00020-1.pdf?hkey=EF798316E3902B6ED9A73243A3159BB0, Height=0.8mm, Manufacturer_Part_Number=NRF24L01-REEL7, Mouser Price/Stock=https://www.mouser.co.uk/ProductDetail/Nordic-Semiconductor/nRF24L01-REEL7?qs=yd0qOhnSiDfNM3Q865kckA%3D%3D
J1: "Connector", Manufacturer_Name="GCT (GLOBAL CONNECTOR TECHNOLOGY)", Mouser Part Number=640-USB4135-GF-A, Datasheet Link=https://ar.mouser.com/datasheet/2/837/usb4135-2930399.pdf, Height=3.5mm, Manufacturer_Part_Number=USB4135-GF-A, Mouser Price/Stock=https://www.mouser.co.uk/ProductDetail/GCT/USB4135-GF-A?qs=Li%252BoUPsLEnt6HRo6RUvaXA%3D%3D
L1: library part CMP-0007-00007-1, "Semi-shielded Power Inductor, 1 uH, +/- 30%, 2.35 A, -40 to 125 degC, 3 x 3 x 1.5 mm SMD, RoHS and Halogen Free, Tape and Reel", Inductance="1 uH", Inductance tolerance="+/- 30%", Manufacturer=Bourns, Operating Temperature="-40 to 125 degC", Rated current="2.35 A", Resistance to Solder Heat="+260 degC for 10 sec.", ComponentLink1Description="Manufacturer URL", ComponentLink1URL=http://www.bourns.com/, ComponentLink2Description=Datasheet, ComponentLink2URL=http://www.bourns.com/data/global/pdfs/SRN3015.pdf, ComponentLink3Description="Package Specification", ComponentLink3URL=http://www.bourns.com/data/global/pdfs/SRN3015.pdf, DatasheetVersion=Aug-11, DCR Max="0.048 Ohm", Isat="2.35 A", Mounting Technology="Surface Mount", PackageDescription="2-Pin SMD, Body 3 x 3 mm, Height 1.5 mm", PackageReference=SRN3015, Packing="Tape and Reel", PartNumber=SRN3015-1R0Y, RoHS=TRUE, SRF Min="145 MHz"
L2: "Inductor", Manufacturer_Name=ABRACON, Datasheet Link=https://abracon.com/Magnetics/inductors/ATFC-0402HQ.pdf, Height=0.37mm, Manufacturer_Part_Number=ATFC-0402HQ-3N9B-T
L3: "Inductor", Manufacturer_Name="Murata Electronics", Mouser Part Number=81-LQG15HS8N2H02D, Arrow Part Number=LQG15HS8N2H02D, Arrow Price/Stock=https://www.arrow.com/en/products/lqg15hs8n2h02d/murata-manufacturing, Datasheet Link=https://psearch.en.murata.com/inductor/product/LQG15HS8N2H02%23.html, Height=0.55mm, Manufacturer_Part_Number=LQG15HS8N2H02D, Mouser Price/Stock=https://www.mouser.co.uk/ProductDetail/Murata-Electronics/LQG15HS8N2H02D?qs=60uY6ySkanTiptaknJqb2Q%3D%3D
L4: "Inductor", Manufacturer_Name=TDK, Mouser Part Number=810-MLG1005S0N3BT000, Arrow Part Number=MLG1005S0N3BT000, Arrow Price/Stock=https://www.arrow.com/en/products/mlg1005s0n3bt000/tdk, Datasheet Link=https://product.tdk.com/system/files/dam/doc/product/inductor/inductor/smd/catalog/inductor_commercial_high-frequency_mlg1005s_en.pdf, Manufacturer_Part_Number=MLG1005S0N3BT000, Mouser Price/Stock=https://www.mouser.co.uk/ProductDetail/TDK/MLG1005S0N3BT000?qs=u4%252BEJ9urDASg1T%252BCePJhFw%3D%3D
LED1 LED2: "LED", Manufacturer_Name="Avago Technologies", Mouser Part Number=630-ASCKCR00BU5V5020, Datasheet Link=https://docs.broadcom.com/doc/ASCKCx00-xxxxx0x0x02-DS, Height=0.75mm, Manufacturer_Part_Number=ASCKCR00-BU5V5020402, Mouser Price/Stock=https://www.mouser.co.uk/ProductDetail/Broadcom-Avago/ASCKCR00-BU5V5020402?qs=OcgtsXO%252B3gu355%2FiA8jcWA%3D%3D
Q1: "MOSFET (N-Channel)", Manufacturer_Name=Nexperia, Mouser Part Number=N/A, Datasheet Link=https://assets.nexperia.com/documents/data-sheet/SI2302DS.pdf, Height=1.1mm, Manufacturer_Part_Number=SI2302DS, Mouser Price/Stock=https://www.mouser.com/Search/Refine.aspx?Keyword=N%2FA
R1 R10: library part CMP-2000-03835-2, "RES SMD 10K OHM 1% 1/3W 0603", Case Code (Imperial)=0603, Case Code (Metric)=1608, Max Operating Temperature=155°C, Max Power Dissipation=250mW, Min Operating Temperature=-55°C, Package Quantity=10, Resistance=10kR, Temperature Coefficient=100ppm/°C, Tolerance=1%, Voltage Rating=75V, Case/Package=0603, Composition="Thick Film", Contact Plating=Tin, Depth=0.85mm, Features="Automotive AEC-Q200", Height=0.45mm, Lead Free="Lead Free", Length=1.6mm, Military Standard=Not, Number of Terminations=2, Packaging="Tape and Reel", Power Rating=250mW, Radiation Hardening=No, Termination=SMD/SMT, Voltage Rating (DC)=75V, Weight=7.1E-05oz, Width=0.033inch
R2 R3 R4: library part CMP-08839-007853-1, "4.7kΩ ±5% 0.25W 0603 Anti-Surge Chip Resistor AEC-Q200", Case Code (Imperial)=0603, Max Operating Temperature=155°C, Max Power Dissipation=250mW, Min Operating Temperature=-55°C, Package Quantity=5000, Resistance=4.7kR, Resistor Type="Thick Film", Temperature Coefficient=200ppm/°C, Tolerance=5%, Case/Package=0603, Features="Automotive AEC-Q200", Height=0.022inch, Length=0.063inch, Number of Terminations=2, Packaging="Tape and Reel", RoHS Compliant=Yes, Series=ESR, Width=0.031inch
R5 R6: library part CMP-1012-00590-3, "RES Thick Film, 5.1kΩ, 1%, 0.1W, 100ppm/°C, 0603", Case Code (Imperial)=0603, Case Code (Metric)=1608, Max Operating Temperature=155°C, Min Operating Temperature=-55°C, Package Quantity=5000, Power Rating=100mW, Resistance=5.1kR, Temperature Coefficient=100ppm/°C, Tolerance=1%, Voltage Rating=75V, Case/Package=0603, Composition="Thick Film", Contact Plating=Tin, Depth=0.85mm, Height=0.45mm, Lead Free="Lead Free", Length=1.55mm, Military Standard=Not, Mount="Surface Mount", Packaging="Tape and Reel", Radiation Hardening=No, Termination=SMD/SMT, Voltage Rating (DC)=75V, Weight=7.1E-05oz, Width=0.85mm
R7 R8: library part CMP-03412-003799-1, "RES SMD 1.5K OHM 1% 1/10W 0603", Manufacturer=Yageo, Package=RT0603, Power Rating=0.1W, Resistance=1.5KΩ, Temperature="-55°C to +155°C", Temperature Coefficient="50 ppm/°C", Temperature Range High=+155°C, Temperature Range Low=-55°C, Tolerance=0.01, Voltage Rating=75V, Automotive=No, Category=Res, ComponentLink2Description=Datasheet, ComponentLink2URL=http://www.yageo.com/documents/recent/PYu-RT_1-to-0.01_RoHS_L_9.pdf, Composition="Thin Film", Device Class L1="Passive Components", Device Class L2=Resistors, Device Class L3="Chip SMD Resistors", Digikey Description="RES SMD 1.5K OHM 1% 1/10W 0603", Footprint Url=http://www.yageo.com/exep/pages/download/literatures/PYu-R_Mount_10.pdf, Height=0.55mm, Ipc Land Pattern Name=RESC16080X45, Lead Free=Yes, Manufacturer Part Number=RT0603FRE071K5L, Mouser Description="Thin Film Resistors - SMD 1/10W 1.5K ohm 1% 50ppm", Octopart=https://octopart.com/rt0603fre071k5l-yageo-39862564, RoHS=TRUE, Series=RT
R9: library part CMP-2000-02970-2, "RES Thick Film, 1kΩ, 1%, 0.33W, 100ppm/°C, 0603", Case Code (Imperial)=0603, Case Code (Metric)=1608, Max Operating Temperature=155°C, Max Power Dissipation=250mW, Min Operating Temperature=-55°C, Package Quantity=10, Resistance=1kR, Temperature Coefficient=100ppm/°C, Tolerance=1%, Voltage Rating=75V, Case/Package=0603, Composition="Thick Film", Contact Plating=Tin, Depth=0.85mm, Features="Automotive AEC-Q200", Height=0.45mm, Lead Free="Lead Free", Length=1.6mm, Military Standard=Not, Mount="Surface Mount", Number of Pins=2, Number of Terminations=2, Packaging="Tape and Reel", Power Rating=250mW, Radiation Hardening=No, Termination=SMD/SMT, Voltage Rating (DC)=75V, Weight=7.1E-05oz, Width=0.8mm
R11: library part CMP-2000-00559-1, Manufacturer=Panasonic, Part Number=ERJ-3EKF5490V
R12: library part CMP-08839-029483-1, "1kΩ ±1% 0.25W 0603 Anti-Surge Chip Resistor AEC-Q200", Case Code (Imperial)=0603, Case Code (Metric)=1608, Max Operating Temperature=155°C, Max Power Dissipation=250mW, Min Operating Temperature=-55°C, Package Quantity=1, Resistance=1kR, Resistor Type="Thick Film", Temperature Coefficient=100ppm/°C, Tolerance=1%, Case/Package=0603, Features="Automotive AEC-Q200", Height=0.022inch, Lead Free="Lead Free", Length=0.063inch, Number of Terminations=2, Packaging="Tape and Reel", Power Rating=250mW, RoHS Compliant=Yes, Series=ESR, Size Code=0603, Width=0.031inch
R13: library part CMP-2000-03823-2, "RES Thick Film, 100kΩ, 5%, 0.1W, 200ppm/°C, 0603", Case Code (Imperial)=0603, Case Code (Metric)=1608, Max Operating Temperature=155°C, Max Power Dissipation=100mW, Min Operating Temperature=-55°C, Package Quantity=1, Resistance=100kR, Temperature Coefficient=200ppm/°C, Tolerance=5%, Voltage Rating=75V, Case/Package=0603, Composition="Thick Film", Contact Plating=Tin, Depth=0.85mm, Features="Automotive AEC-Q200", Height=0.02inch, Length=1.55mm, Military Standard=Not, Mount="Surface Mount", Number of Pins=2, Number of Terminations=2, Packaging="Tape and Reel", Power Rating=100mW, Radiation Hardening=No, Termination=SMD/SMT, Weight=7.1E-05oz, Width=0.85mm, Working Voltage=75V
R14 R15: library part CMP-1012-00849-3, "RES SMD 1M OHM 1% 1/10W 0603", Case Code (Imperial)=0603, Case Code (Metric)=1608, Max Operating Temperature=155°C, Max Power Dissipation=100mW, Min Operating Temperature=-55°C, Package Quantity=1, Resistance=1MR, Resistance Tolerance=1%, Resistor Type="Thick Film", Temperature Coefficient=100ppm/°C, Voltage Rating=75V, Case/Package=0603, Construction=Rectangular, Contact Plating=Tin, Depth=0.8mm, Features="Automotive AEC-Q200", Height=0.022inch, Lead Free="Lead Free", Length=1.6mm, Military Standard=Not, Mount="Surface Mount", Number of Pins=2, Number of Terminations=2, Packaging="Tape and Reel", Power Rating=100mW, Radiation Hardening=No, REACH SVHC="No SVHC", RoHS Compliant=Yes, Series=ERJ, Size Code=0603, Termination=SMD/SMT, Tolerance=1%, Voltage Rating (DC)=75V, Width=0.8mm
R16: "Resistor", Manufacturer_Name="KOA Speer", Mouser Part Number=660-RN73H1JTD1113D25, Datasheet Link=https://www.mouser.com/datasheet/2/219/RN73H-12200.pdf, Height=0.55mm, Manufacturer_Part_Number=RN73H1JTTD1113D25, Mouser Price/Stock=https://www.mouser.co.uk/ProductDetail/KOA-Speer/RN73H1JTTD1113D25?qs=0hon8nwgHrb8JI0BK8RpbQ%3D%3D
R17 R18 R19: library part CMP-2000-05022-1, "Resistor, 10 KOhm, +/- 5%, 100 mW, -55 to 155 degC, 0603 (1608 Metric), RoHS, Tape and Reel", Case Code - in=0603, Case Code - mm=1608, Manufacturer=Yageo, Operating Temperature Range=-55Cto+155C, Package Description="2-Pin Surface Mount Device, Body 1.6 x 0.8 mm", Package Reference=603, Power Rating=100mW, Resistance=10kOhms, Temperature Coefficient=100PPM/C, Tolerance=5%, Voltage Rating=50V, Datasheet URL=http://www.farnell.com/datasheets/443971.pdf, Datasheet Version="Rev. 4, 04/2009", Manufacturer URL=http://www.yageo.com/, Packaging=Reel, Product=ThickFilmResistorsGeneralPurpose, Series=RC, Termination Style=SMD/SMT
R20: "Resistor", Manufacturer_Name=Panasonic, Mouser Part Number=667-ERA-2AEB223X, Arrow Part Number=ERA-2AEB223X, Arrow Price/Stock=https://www.arrow.com/en/products/era2aeb223x/panasonic?region=europe, Datasheet Link=http://industrial.panasonic.com/cdbs/www-data/pdf/RDM0000/AOA0000C307.pdf, Height=0.4mm, Manufacturer_Part_Number=ERA-2AEB223X, Mouser Price/Stock=https://www.mouser.co.uk/ProductDetail/Panasonic/ERA-2AEB223X?qs=YFwoyZoVY0gOqA4AmOyJ2g%3D%3D
R21: "Resistor", Manufacturer_Name=KEMET, Mouser Part Number=603-RC0402FR-071ML, Datasheet Link=http://www.yageo.com/documents/recent/PYu-RC0402_51_RoHS_L_6_r.pdf, Height=0.4mm, Manufacturer_Part_Number=RC0402FR-071ML, Mouser Price/Stock=https://www.mouser.co.uk/ProductDetail/YAGEO/RC0402FR-071ML?qs=V1yeUXFNrknfoI4987wfBQ%3D%3D
SW1: "Switch", Manufacturer_Name="TE Connectivity", Mouser Part Number=506-USLPT2819DT2TR, Arrow Part Number=USLPT2819DT2TR, Arrow Price/Stock=https://www.arrow.com/en/products/uslpt2819dt2tr/te-connectivity?region=nac, Datasheet Link=https://www.te.com/commerce/DocumentDelivery/DDEController?Action=srchrtrv&DocNm=2337225-1&DocType=Data%20Sheet&DocLang=English&PartCntxt=2337225-1&DocFormat=pdf, Height=0.6mm, Manufacturer_Part_Number=USLPT2819DT2TR, Mouser Price/Stock=https://www.mouser.co.uk/ProductDetail/TE-Connectivity-PB/USLPT2819DT2TR?qs=qSfuJ%252Bfl%2Fd7zUoyEnK5Yzg%3D%3D
SW2 SW3 SW4: library part CMP-00287-21697262-1, "EVP-AEDB2A Switch Tactile N.O. SPST Rectangular Button J-Bend 0.02A 15VDC 200000Cycles 3N SMD Embossed T/R", Case/Package=SMD/SMT, Color=Black, Contact Current Rating=20mA, Contact Resistance=1Ω, Current Rating=50mA, Max Operating Temperature=85°C, Min Operating Temperature=-40°C, Operating Force=3N, Voltage Rating (DC)=12V, Height=2.9mm, Illumination Type="Illuminated, Non-Illuminated", Lead Free="Lead Free", Length=4.5mm, Life (Cycles)=200kcycles, Mechanical Life=200kcycles, Mount="Surface Mount", NexarPartId=21697262, REACH SVHC=Unknown, RoHS=Compliant, Switch Function=Off-Mom, Switch Travel=150µm, Termination=SMD/SMT, Throw Configuration=SPST, Width=2.2mm
U1: library part CMP-020-00003-3, "8-Bit Microcontroller with 32 KBytes In-System Programmable Flash, 23 I/Os, -40 to 85 degC, 32-Pin TQFP (32A), RoHS, Tray", Case/Package=TQFP, Clock Frequency=20MHz, Manufacturer=Atmel, Max Operating Temperature=85°C, Max Supply Voltage=5.5V, Min Operating Temperature=-40°C, Min Supply Voltage=1.8V, Package Description="32-Pin Thin Profile Plastic Quad Flat Package, Body 7 x 7 mm, Pitch 0.8 mm", Package Quantity=250, Package Reference=32A, ADC Channels=8, Datasheet URL=http://www.atmel.com/images/Atmel-8271-8-bit-AVR-Microcontroller-ATmega48A-48PA-88A-88PA-168A-168PA-328-328P_datasheet_Complete.pdf, Datasheet Version="Rev. 8271J, 11/2015", Density=32KB, Ethernet Channels=0, Frequency=20MHz, I/Os=23, Interface=USART, Manufacturer URL=http://www.atmel.com/, Max Clock Frequency=20MHz, Mounting Technology=SM, Packaging=Tray, Pins=32, PWM Channels=6, RAM Size=2KB, RoHS Compliant=True, USB Channels=0
U2: library part CMP-0321-00456-2, "800 mA, Single-Input, Single Cell Li-Ion Battery Charger with Auto Start. Vovp=6.6 V, 3.5 V, -40 to 85 degC, 10-pin SON (DSQ), Green (RoHS & no Sb/Br)", Manufacturer="Texas Instruments", Over Voltage Protection=N, ComponentLink1Description=Datasheet, ComponentLink1URL=http://www.ti.com/general/docs/lit/getliterature.tsp?genericPartNumber=BQ24040&fileType=pdf, DatasheetVersion=SLUS941A, Eco-Plan="Green (RoHS & no Sb/Br)", Lead Acid=N, Li-Ion=N, Li-Polymer=N, Mounting Technology="Surface Mount", NiCd=N, NiMH=N, PackageDescription="10-Pin Plastic Small Outline No-Lead, 2 x 2 x 0.8 mm Body, 0.4 mm Pitch, Exposed Pad", PackageReference=DSQ0010A, PackageVersion="revB, Apr-2010", PartNumber=BQ24040DSQR, SubFamily="Battery Charge Management", Vin(Min)(V)=3.5
U3: library part CMP-04918-000043-1, "IC REG BCK BST ADJ 2A 10WSON", Ambient Temperature Range High=+85°C, Ambient Temperature Range Low=-40°C, Manufacturer="Texas Instruments", Max Junction Temp=+125°C, Max Supply Voltage=12V, Min Supply Voltage=2.5V, Nominal Supply Current=30uA, Output Current=1A, Output Voltage=2.5-8V, Package=DSC0010G, Switching Frequency=2400kHz, Temperature="-40°C to +85°C", Automotive=No, Category=IC, ComponentLink2Description=Datasheet, ComponentLink2URL=http://www.ti.com/lit/ds/symlink/tps63060.pdf, Device Class L1="Integrated Circuits (ICs)", Device Class L2="Power Management ICs", Device Class L3="Voltage Regulators - Switching", Digikey Description="IC REG BCK BST ADJ 2A 10WSON", Height=0.8mm, Ipc Land Pattern Name=DFN300X300X70-10, Lead Free=Yes, Manufacturer Part Number=TPS63060DSCR, Max Duty Cycle=100%, Mouser Description="Voltage Regulators - Switching Regulators 2.5-12Vin,2.25A Sw Crnt Limit", Number Of Outputs=1, Octopart=https://octopart.com/tps63060dscr-texas+instruments-21396306, Output Type=AdjustableProgrammable, RoHS=TRUE, Standoff Height=0mm, Switching Topology=Buck-Boost, Temperature Range High=+85°C, Temperature Range Low=-40°C
U4: library part CMP-2000-05782-2, "IC REG LINEAR 3.3V 150MA SOT23-5", Case/Package=SOT-23-5, Dropout Voltage=360mV, Max Input Voltage=24V, Max Operating Temperature=85°C, Max Output Current=250mA, Min Input Voltage=2.3V, Min Operating Temperature=-40°C, Output Current=150mA, Output Voltage=3.3V, Package Quantity=3000, Quiescent Current=50uA, Reference Voltage=1.24V, Height=1.3mm, Lead Free="Lead Free", Length=3.02mm, Mount="Surface Mount", Number Of Outputs=1, Number of Pins=5, Number of Regulators=1, Output Type=Fixed, Packaging="Tape and Reel", Polarity=Positive, Weight=0.001058oz, Width=1.7mm
Y1: library part CMP-27762-015167-1, "Crystal 16MHz ±30ppm (Tol) ±30ppm (Stability) 10pF FUND 80Ω 4-Pin SMD T/R", Case/Package=CSMD, ESR (Equivalent Series Resistance)=80R, Frequency=16MHz, Frequency Stability=30ppm, Load Capacitance=10pF, Max Operating Temperature=70°C, Min Operating Temperature=-20°C, Operating Frequency="16 MHz", Package Quantity=1000, Depth=2.5mm, Frequency Tolerance=30ppm, Height=1mm, Lead Free="Lead Free", Length=3.2mm, Mount="Surface Mount", Number of Pins=4, Packaging="Tape and Reel", Series=ABM8G, Termination=SMD/SMT, Tolerance=30ppm, Width=2.5mm
Y2: library part CMP-2000-05039-3, "Crystal 12MHz ±20ppm (Tol) ±30ppm (Stability) 18pF FUND 120Ω 4-Pin SMD T/R", Case/Package=CSMD, ESR (Equivalent Series Resistance)=120R, Frequency=12MHz, Frequency Stability=30ppm, Frequency Tolerance=20ppm, Load Capacitance=18pF, Max Operating Temperature=85°C, Min Operating Temperature=-40°C, Operating Frequency="12 MHz", Package Quantity=1000, Depth=2.5mm, Height=1mm, Lead Free="Lead Free", Length=3.2mm, Mount="Surface Mount", Number of Pins=4, Packaging="Tape and Reel", Radiation Hardening=No, Series=ABM8G, Series Resistance=120R, Termination=SMD/SMT, Tolerance=20ppm, Width=2.5mm

## Via types
v1: diameter 23.62, hole 11.81, Top Layer to Bottom Layer, 5 vias

## Nets (pads, with @x,y where several pads share a name; then routed paths per layer and width w, separated by ;. In a path a pad name is that pad's centre, name@x,y a point inside that pad or via, vN(x,y) a via of type N, cw(c..) or ccw(c..) an arc to the next point about the centre after c; other vN are vias at no path point)
1.8V: C9.1 C10.1 IC1.5 IC2.11
3V3: C11.1 C22.1 C30.2 C36.1 IC2.9 IC2.10 IC3.7 IC3.15 U4.5
3V7: C15.1 C16.1 U3.2 U3.3
+3V3: C12.1 R7.2 R8.2 U2.10
GND: A.2 C1.2 C2.2 C3.2 C4.2 C5.2 C6.2 C7.2 C8.2 C9.2 C10.2 C11.2 C12.2 C13.2 C15.2 C16.2 C17.2 C18.2 C19.2 C20.2 C21.1 C22.2 C23.2 C24.2 C25.2 C26.2 C30.1 C33.1 C34.1 C35.1 C36.2 C37.1 C38.1 IC1.2 IC2.4 IC2.12 IC3.8 IC3.14 J1.A12 J1.B12 Q1.2 R5.1 R6.1 R9.1 R10.1 R11.1 R13.1 R16.1 SW1.T2 SW2.1 SW2.1' SW3.1 SW3.1' SW4.1 SW4.1' U1.3 U1.5 U1.21 U2.3 U2.7 U2.11 U3.7 U3.11 U4.2 Y1.2 Y1.4 Y2.2 Y2.4
  other v1: 10025.32,1125.32 10064.68,1125.32 10045,1145 10025.32,1164.68 10064.68,1164.68
NetA_1: A.1 C32.2 C33.2
NetC2_1: C2.1 U1.20
NetC14_2: C14.2 D1.2 Q1.3
NetC17_1: C17.1 U3.6
NetC21_2: C21.2 R14.1 R16.2 U3.8
NetC24_1: C24.1 R17.1 SW2.2 U1.32
NetC25_1: C25.1 R18.1 SW3.2 U1.1
NetC26_1: C26.1 R19.1 SW4.2 U1.2
NetC27_1: C27.1 C28.1 C29.1 IC3.17 R20.2
NetC27_2: C27.2 C28.2 C29.2 IC3.18
NetC31_1: C31.1 IC3.20 IC3.21
NetC31_2: C31.2 IC3.19
NetC32_1: C32.1 L2.2
NetIC2_2: IC2.2 R4.1 U1.28
NetIC2_3: IC2.3 R2.1 U1.27
NetIC2_13: IC2.13 R3.2
NetIC3_1: IC3.1 U1.12
NetIC3_2: IC3.2 U1.11
NetIC3_3: IC3.3 U1.17
NetIC3_4: IC3.4 U1.15
NetIC3_5: IC3.5 U1.16
NetIC3_12: IC3.12 L3.1 L4.1
NetIC3_13: IC3.13 L2.1 L3.2
NetIC3_16: IC3.16 R20.1
NetJ1_A5: J1.A5 R5.2
NetJ1_B5: J1.B5 R6.2
NetL1_1: L1.1 U3.1
NetL1_2: L1.2 U3.10
NetLED1_1: LED1.1 U2.8
NetLED1_2: LED1.2 R7.1
NetLED2_1: LED2.1 U2.5
NetLED2_2: LED2.2 R8.1
NetQ1_1: Q1.1 R12.2 R13.2
NetR2_2: R2.2 R3.1 R4.2
NetR9_2: R9.2 U2.4
NetR10_2: R10.2 U2.9
NetR11_2: R11.2 U2.2
NetR12_1: R12.1 U1.9
PG: R15.1 U3.5
RST: R1.1 SW1.T1 U1.29
USBin: C13.1 J1.A9 J1.B9 U2.1
Vcc: C1.1 C3.1 C4.1 C7.1 C8.1 C18.1 C19.1 C20.1 C23.1 IC1.1 IC1.3 R1.2 R14.2 R15.2 R17.2 R18.2 R19.2 U1.4 U1.6 U1.18 U3.9 U4.1 U4.3
VDD_PA: C34.2 C35.2 IC3.11 L4.2
XTAL1: C5.1 U1.7 Y1.1
XTAL2: C6.1 U1.8 Y1.3
XTAL_1: C38.2 IC3.10 R21.2 Y2.3
XTAL_2: C37.2 IC3.9 R21.1 Y2.1
pads on no net: C14.1 D1.1 IC1.4 IC2.1 IC2.5 IC2.6 IC2.7 IC2.8 IC2.14 IC3.6 J1.MP1 J1.MP2 J1.MP3 J1.MP4 SW1.T3 SW1.T4 SW2.3 SW2.4 SW3.3 SW3.4 SW4.3 SW4.4 U1.10 U1.13 U1.14 U1.19 U1.22 U1.23 U1.24 U1.25 U1.26 U1.30 U1.31 U2.6 U3.4 U4.4